# Altium PCB 核心板.PcbDoc (part 3 of 3)
Units mm, origin at the board's own origin, x right, y up, seen from the top; angles counter-clockwise.
Board outline 93.66 x 72.54 mm, 2 copper layers (Top Layer, Bottom Layer); 96 components, 149 nets, 537 pads, 213 vias.
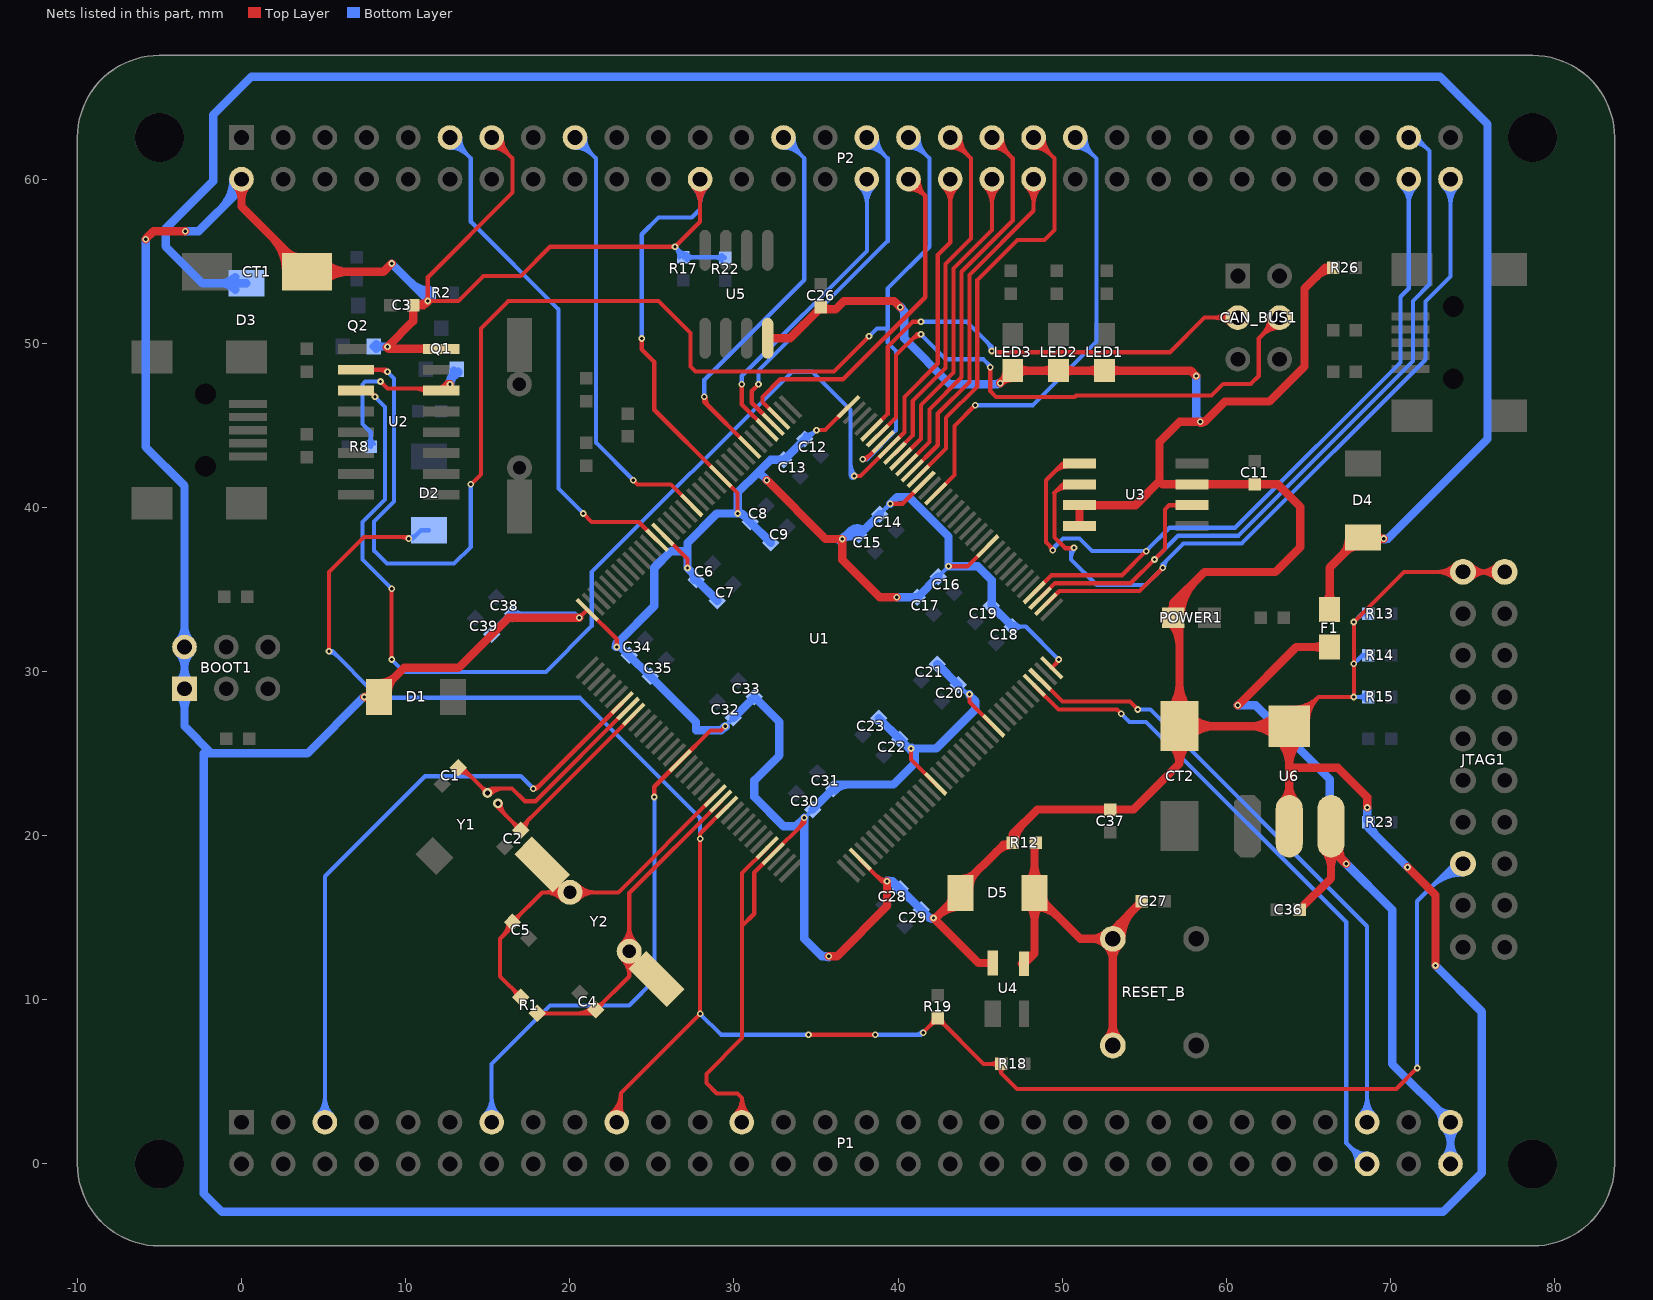
[diagram p3: the nets of this part, all layers, seen from the top]

## Via types
v1: diameter 0.406, hole 0.203, Top Layer to Bottom Layer, 212 vias
v2: diameter 0.508, hole 0.254, Top Layer to Bottom Layer, 1 vias

## Nets (pads, with @x,y where several pads share a name; then routed paths per layer and width w, separated by ;. In a path a pad name is that pad's centre, name@x,y a point inside that pad or via, vN(x,y) a via of type N, cw(c..) or ccw(c..) an arc to the next point about the centre after c; other vN are vias at no path point) (continued)
OSC32_IN: C1.1 U1.8 Y1.1 | length 17.5
  Top Layer w0.254: C1.1@13.208,23.876 cw(c13.208,22.65) 14.075,23.517 ; 13.642,23.95 ccw(c13.208,23.517) C1.1@13.208,24.13 13.462,24.13 Y1.1@14.986,22.606 15.262,22.882 16.488,22.882 17.272,22.098 17.903,22.098 U1.8@23.55,27.745 ; Y1.1@14.813,22.606 ccw(c14.395,22.606) 14.691,22.901 ccw(c14.986,23.197) Y1.1@14.986,22.779 ; Y1.1@14.929,22.663 cw(c15.457,22.135) 15.457,22.882 ; Y1.1@15.108,22.484 cw(c16.07,21.522) 16.07,22.882
OSC32_OUT: C2.1 U1.9 Y1.2 | length 14.8
  Top Layer w0.254: Y1.2@15.622,21.97 15.622,21.716 C2.1@17.018,20.32 17.018,20.506 U1.9@23.904,27.392 ; Y1.2@15.795,21.97 ccw(c16.826,21.97) 16.097,21.241 ; C2.1@16.764,20.32 ccw(c16.151,20.32) 16.584,20.754 ccw(c17.018,21.187) C2.1@17.018,20.574 ; C2.1@17.272,20.32 cw(c18.334,20.32) 17.583,21.071
OSC_IN: C5.1 R1.1 U1.23 Y2.2 | length 32
  Top Layer w0.254: 15.897,13.865 ccw(c15.03,14.732) C5.1@16.256,14.732 ; 16.33,14.298 ccw(c15.897,14.732) C5.1@16.51,14.732 ; C5.1@16.51,14.986 ccw(c16.51,15.599) 16.944,15.166 ccw(c17.377,14.732) C5.1@16.764,14.732 ; R1.1@16.764,10.16 ccw(c16.151,10.16) 16.584,10.594 ccw(c17.018,11.027) R1.1@17.018,10.414 ; R1.1@17.018,10.16 15.748,11.43 15.748,13.716 16.51,14.478 C5.1@16.51,14.732 ; Y2.2@19.565,16.097 ccw(c18.481,15.013) 18.481,16.546 ccw(c18.481,18.079) Y2.2@19.565,16.995 ; Y2.2@19.745,16.277 ccw(c19.095,15.626) 19.095,16.546 ccw(c19.095,17.466) Y2.2@19.745,16.816 ; Y2.2@20.284,16.277 cw(c20.934,15.626) 20.934,16.546 cw(c20.934,17.466) Y2.2@20.284,16.816 ; Y2.2@20.463,16.097 cw(c21.548,15.013) 21.548,16.546 cw(c21.548,18.079) Y2.2@20.463,16.995 ; U1.23@28.853,22.442 22.958,16.546 Y2.2@20.014,16.546 18.324,16.546 C5.1@16.51,14.732
OSC_OUT: C4.1 R1.2 U1.24 Y2.1 | length 30.8
  Top Layer w0.254: R1.2@18.006,9.172 21.364,9.172 C4.1@21.59,9.398 ; R1.2@18.185,8.993 cw(c18.619,8.559) 18.619,9.172 cw(c18.619,9.785) R1.2@18.185,9.352 ; 20.432,9.172 ccw(c20.432,10.556) C4.1@21.41,9.578 ; 21.045,9.172 ccw(c21.045,9.943) C4.1@21.59,9.398 ; C4.1@21.59,9.652 ccw(c21.59,10.265) 22.024,9.832 ccw(c22.457,9.398) C4.1@21.844,9.398 ; Y2.1@23.173,13.403 ccw(c22.089,14.487) 23.622,14.487 ccw(c25.155,14.487) Y2.1@24.071,13.403 ; Y2.1@23.175,12.503 cw(c22.111,11.43) 23.622,11.43 ; Y2.1@23.353,13.223 ccw(c22.702,13.874) 23.622,13.874 ccw(c24.542,13.874) Y2.1@23.891,13.223 ; Y2.1@23.354,12.683 cw(c22.715,12.04) 23.622,12.04 cw(c24.529,12.04) Y2.1@23.89,12.683 ; Y2.1@24.069,12.503 ccw(c25.133,11.43) 23.622,11.43 ; U1.24@29.207,22.088 23.622,16.503 Y2.1@23.622,12.954 23.622,11.43 ; C4.1@21.59,9.398 23.622,11.43
PA8: P2.35 U1.100 | length 25.4
  Top Layer w0.254: U1.100@39.814,43.302 40.894,44.382 40.894,46.482 42.901,48.489 42.901,54.839 44.45,56.388 44.45,61.27 P2.35@43.18,62.54 ; P2.35@43.18,61.917 cw(c43.18,60.413) 44.244,61.476 cw(c45.307,62.54) P2.35@43.803,62.54 ; P2.35@43.18,62.171 cw(c43.18,61.28) 43.81,61.91 cw(c44.44,62.54) P2.35@43.549,62.54
PA9: P2.36 U1.101 U2.3 | length 87.9
  Top Layer w0.254: U2.3@6.968,47.117 7.747,47.117 v1(8.128,46.736) ; U2.3@7.768,46.944 cw(c7.768,46.577) U2.3@8.027,46.837 ; U2.3@7.941,47.117 ccw(c8.409,47.117) v1@8.078,46.786 ; v1(9.144,30.734) v1(9.144,35.052) ; v1(37.338,41.91) 37.715,41.91 U1.101@39.46,43.655 40.386,44.581 40.386,46.736 42.418,48.768 42.418,55.372 43.18,56.134 P2.36@43.18,60 ; P2.36@42.739,59.559 cw(c41.676,58.496) 43.18,58.496 cw(c44.684,58.496) P2.36@43.621,59.559 ; P2.36@42.919,59.739 cw(c42.289,59.109) 43.18,59.109 cw(c44.071,59.109) P2.36@43.441,59.739
  Bottom Layer w0.254: v1(8.128,46.736) 8.738,46.126 8.738,40.488 7.366,39.116 7.366,36.83 v1(9.144,35.052) ; v1(9.144,30.734) 9.906,29.972 18.542,29.972 21.336,32.766 21.336,36.068 33.528,48.26 34.798,48.26 37.112,45.946 37.112,42.136 v1(37.338,41.91) ; 37.112,42.026 ccw(c37.454,42.026) v1@37.212,41.784 ; 37.112,42.639 ccw(c38.067,42.639) v1@37.392,41.964
PA10: P2.33 U1.102 U2.2 | length 93.4
  Top Layer w0.254: U2.2@6.968,48.387 8.763,48.387 v1(8.89,48.26) ; U2.2@7.89,48.265 cw(c8.186,47.969) 8.186,48.387 cw(c8.186,48.805) U2.2@7.89,48.509 ; 8.399,48.387 cw(c8.399,47.769) v1@8.836,48.206 ; v1(13.97,41.402) 14.584,42.016 14.584,50.907 16.256,52.578 25.4,52.578 27.356,50.622 27.356,48.59 27.657,48.289 36.097,48.289 v1(38.227,50.419) ; v1(37.846,42.926) 38.024,42.926 U1.102@39.106,44.009 ; v1@37.846,43.002 ccw(c37.846,43.615) 38.28,43.182
  Bottom Layer w0.254: v1(8.89,48.26) 9.296,47.854 9.296,40.364 8.079,39.146 8.079,37.362 8.865,36.576 12.954,36.576 13.97,37.592 v1(13.97,41.402) ; v1(37.846,42.926) 38.1,42.926 39.878,44.704 39.878,49.53 39.37,50.038 39.37,50.902 ; v1@37.846,43.002 ccw(c37.846,43.799) 38.41,43.236 ; v1(38.227,50.419) 38.71,50.902 39.37,50.902 ; P2.33@40.64,61.917 cw(c40.64,60.413) 41.704,61.476 cw(c42.767,62.54) P2.33@41.263,62.54 ; P2.33@40.64,62.171 cw(c40.64,61.28) 41.27,61.91 cw(c41.9,62.54) P2.33@41.009,62.54 ; P2.33@40.64,62.54 41.91,61.27 41.91,55.88 39.37,53.34 39.37,50.902
PA11: CAN_BUS1.4 U1.103 | length 39.8
  Top Layer w0.254: U1.103@38.753,44.362 39.878,45.487 39.878,49.276 41.148,50.546 v1(41.402,50.546) ; 40.838,50.236 cw(c41.402,49.673) v1@41.402,50.47 ; v1(45.618,48.539) 45.644,48.514 45.644,48.438 45.618,48.412 45.618,47.092 45.974,46.736 50.772,46.736 50.845,46.809 59.103,46.809 59.811,47.517 61.487,47.517 61.976,48.006 61.976,50.292 CAN_BUS1.4@63.246,51.562 ; CAN_BUS1.4@62.623,51.562 cw(c61.119,51.562) 62.182,50.498 cw(c63.246,49.435) CAN_BUS1.4@63.246,50.939 ; CAN_BUS1.4@62.877,51.562 cw(c61.986,51.562) 62.616,50.932 cw(c63.246,50.302) CAN_BUS1.4@63.246,51.193
  Bottom Layer w0.254: v1(41.402,50.546) 42.926,49.022 45.212,49.022 45.618,48.616 v1(45.618,48.539) ; 45.434,48.8 cw(c45.174,48.539) v1@45.542,48.539
PA12: CAN_BUS1.3 U1.104 | length 34
  Top Layer w0.254: U1.104@38.399,44.716 39.37,45.686 39.37,49.784 40.894,51.308 v1(41.402,51.308) ; v1(45.72,49.53) 45.796,49.454 56.566,49.454 58.674,51.562 CAN_BUS1.3@60.706,51.562 ; v1@45.774,49.584 ccw(c46.088,49.898) 46.088,49.454 ; CAN_BUS1.3@60.265,51.121 ccw(c59.202,50.058) 59.202,51.562 ccw(c59.202,53.066) CAN_BUS1.3@60.265,52.003 ; CAN_BUS1.3@60.445,51.301 ccw(c59.815,50.671) 59.815,51.562 ccw(c59.815,52.453) CAN_BUS1.3@60.445,51.823
  Bottom Layer w0.254: v1(41.402,51.308) 44.196,51.308 45.72,49.784 v1(45.72,49.53) ; 45.41,50.094 cw(c44.847,49.53) v1@45.644,49.53
PB10: P1.56 U1.69 | length 44
  Top Layer w0.254: U1.69@48.299,29.159 49.772,27.686 53.34,27.686 v1(53.594,27.432)
  Bottom Layer w0.254: v1(53.594,27.432) 54.102,26.924 55.118,26.924 67.31,14.732 67.31,13.97 67.31,1.27 P1.56@68.58,0 ; P1.56@67.957,0 ccw(c66.453,0) 67.516,1.064 ccw(c68.58,2.127) P1.56@68.58,0.623 ; P1.56@68.211,0 ccw(c67.32,0) 67.95,0.63 ccw(c68.58,1.26) P1.56@68.58,0.369
PB11: P1.55 U1.70 | length 41.9
  Top Layer w0.254: U1.70@48.652,29.513 48.677,29.513 50.021,28.169 54.127,28.169 v1(54.61,27.686)
  Bottom Layer w0.254: v1(54.61,27.686) 55.372,27.686 68.58,14.478 P1.55@68.58,2.54 ; P1.55@68.139,2.981 ccw(c67.076,4.044) 68.58,4.044 ccw(c70.084,4.044) P1.55@69.021,2.981 ; P1.55@68.319,2.801 ccw(c67.689,3.431) 68.58,3.431 ccw(c69.471,3.431) P1.55@68.841,2.801
PB13: P2.60 U1.74 U3.6 | length 61
  Top Layer w0.254: U1.74@49.006,34.109 49.03,34.109 49.821,34.9 54.712,34.9 v1(56.134,36.322) ; 49.519,40.883 cw(c50.343,40.059) U3.6@50.343,41.224 ; 49.953,41.317 cw(c50.343,40.926) U3.6@50.343,41.478 ; 50.479,37.516 ccw(c50.479,37.786) v1@50.67,37.595 ; v1(50.724,37.541) 50.698,37.516 50.19,37.516 49.53,38.176 49.53,40.894 50.038,41.402 U3.6@51.054,41.402
  Bottom Layer w0.254: 50.546,36.928 cw(c51.337,36.928) v1@50.778,37.487 ; v1(50.724,37.541) 50.546,37.363 50.546,36.83 52.108,35.268 55.08,35.268 v1(56.134,36.322) 56.134,36.546 57.383,37.795 60.937,37.795 72.136,48.994 72.136,52.548 73.66,54.072 P2.60@73.66,60 ; v1@56.21,36.322 cw(c56.936,36.322) 56.423,36.835 ; P2.60@73.219,59.559 cw(c72.156,58.496) 73.66,58.496 cw(c75.164,58.496) P2.60@74.101,59.559 ; P2.60@73.399,59.739 cw(c72.769,59.109) 73.66,59.109 cw(c74.551,59.109) P2.60@73.921,59.739
PB14: P2.57 U1.75 U3.2 | length 51.7
  Top Layer w0.254: U1.75@48.652,34.463 49.572,35.382 54.178,35.382 v1(55.626,36.83) 56.261,37.465 56.261,39.878 56.517,40.134 U3.2@57.912,40.134 ; U3.2@57.075,40.008 ccw(c56.772,39.704) 56.772,40.134 ccw(c56.772,40.563) U3.2@57.075,40.259
  Bottom Layer w0.254: v1(55.626,36.83) 57.074,38.278 60.738,38.278 71.374,48.914 71.374,52.578 72.39,53.594 72.39,61.722 71.572,62.54 P2.57@71.12,62.54 ; P2.57@71.141,62.427 cw(c71.301,61.55) 71.932,62.18 ; P2.57@71.187,62.177 cw(c71.407,60.972) 72.274,61.838 ; P2.57@71.743,62.54 ccw(c72.156,62.54) 71.864,62.248
PB15: P2.58 U1.76 U3.5 | length 58.5
  Top Layer w0.254: U1.76@48.299,34.816 49.347,35.865 53.645,35.865 v1(55.118,37.338) ; 49.238,37.664 cw(c48.962,37.389) v1@49.352,37.389 ; v1(49.428,37.389) 49.428,37.474 49.022,37.88 49.022,41.656 50.038,42.672 U3.5@51.054,42.672 ; 49.519,42.153 cw(c50.343,41.329) U3.5@50.343,42.494 ; 49.953,42.587 cw(c50.343,42.196) U3.5@50.343,42.748
  Bottom Layer w0.254: v1(49.428,37.389) 49.428,37.478 50.05,38.1 51.054,38.1 51.816,37.338 v1(55.118,37.338) 56.54,38.76 60.538,38.76 70.612,48.835 70.612,52.832 71.12,53.34 P2.58@71.12,60 ; v1@49.505,37.389 cw(c49.904,37.389) 49.622,37.672 ; P2.58@70.679,59.559 cw(c69.616,58.496) 71.12,58.496 cw(c72.624,58.496) P2.58@71.561,59.559 ; P2.58@70.859,59.739 cw(c70.229,59.109) 71.12,59.109 cw(c72.011,59.109) P2.58@71.381,59.739
PC6: P2.39 U1.96 | length 29.7
  Top Layer w0.254: U1.96@41.228,41.887 42.926,43.586 42.926,45.466 44.831,47.371 44.831,53.848 47.269,56.286 48.92,56.286 49.53,56.896 49.53,61.27 P2.39@48.26,62.54 P2.39@48.26,62.23 ; P2.39@48.26,61.917 cw(c48.26,60.413) 49.324,61.476 cw(c50.387,62.54) P2.39@48.883,62.54 ; P2.39@48.26,62.171 cw(c48.26,61.28) 48.89,61.91 cw(c49.52,62.54) P2.39@48.629,62.54
PC7: P2.40 U1.97 | length 24.6
  Top Layer w0.254: U1.97@40.874,42.241 42.418,43.785 42.418,45.72 44.348,47.65 44.348,54.161 48.26,58.072 P2.40@48.26,60 ; P2.40@47.819,59.559 cw(c46.756,58.496) 48.26,58.496 cw(c49.764,58.496) P2.40@48.701,59.559 ; P2.40@47.999,59.739 cw(c47.369,59.109) 48.26,59.109 cw(c49.151,59.109) P2.40@48.521,59.739
PC8: P2.37 U1.98 | length 26.9
  Top Layer w0.254: U1.98@40.521,42.594 41.91,43.984 41.91,45.974 43.866,47.93 43.866,54.361 46.99,57.485 46.99,61.27 P2.37@45.72,62.54 ; P2.37@45.72,61.917 cw(c45.72,60.413) 46.784,61.476 cw(c47.847,62.54) P2.37@46.343,62.54 ; P2.37@45.72,62.171 cw(c45.72,61.28) 46.35,61.91 cw(c46.98,62.54) P2.37@46.089,62.54
PC9: P2.38 U1.99 | length 23.1
  Top Layer w0.254: U1.99@40.167,42.948 41.402,44.183 41.402,46.228 43.383,48.209 43.383,54.561 45.72,56.897 P2.38@45.72,60 ; P2.38@45.279,59.559 cw(c44.216,58.496) 45.72,58.496 cw(c47.224,58.496) P2.38@46.161,59.559 ; P2.38@45.459,59.739 cw(c44.829,59.109) 45.72,59.109 cw(c46.611,59.109) P2.38@45.981,59.739
PC10: P2.34 U1.111 | length 25.3
  Top Layer w0.254: U1.111@32.742,45.423 31.75,46.415 31.75,46.736 32.82,47.806 36.655,47.806 41.656,52.807 41.656,58.984 ; P2.34@40.64,60 41.656,58.984 ; P2.34@40.652,59.631 cw(c40.678,58.835) 41.242,59.398 cw(c41.805,59.962) P2.34@41.009,59.988 ; P2.34@40.66,59.377 cw(c40.705,58.033) 41.656,58.984 ; P2.34@41.263,59.98 ccw(c42.607,59.935) 41.656,58.984
PC11: P2.31 U1.112 | length 25.7
  Top Layer w0.254: v1(31.496,47.498) 31.085,47.087 31.085,46.373 U1.112@32.389,45.069
  Bottom Layer w0.254: v1(31.496,47.498) 31.496,48.347 39.37,56.221 39.37,61.27 P2.31@38.1,62.54 ; P2.31@38.1,61.917 cw(c38.1,60.413) 39.164,61.476 cw(c40.227,62.54) P2.31@38.723,62.54 ; P2.31@38.1,62.171 cw(c38.1,61.28) 38.73,61.91 cw(c39.36,62.54) P2.31@38.469,62.54
PC12: P2.32 U1.113 | length 22.8
  Top Layer w0.254: v1(30.48,47.498) 30.48,46.271 U1.113@32.035,44.716
  Bottom Layer w0.254: v1(30.48,47.498) 30.48,48.013 38.1,55.633 P2.32@38.1,60 ; P2.32@37.659,59.559 cw(c36.596,58.496) 38.1,58.496 cw(c39.604,58.496) P2.32@38.541,59.559 ; P2.32@37.839,59.739 cw(c37.209,59.109) 38.1,59.109 cw(c38.991,59.109) P2.32@38.361,59.739
PC13: P1.5 U1.7 | length 42.4
  Top Layer w0.254: v1(17.78,22.86) 17.958,22.86 U1.7@23.197,28.099 ; v1@17.78,22.936 ccw(c17.78,23.549) 18.214,23.116
  Bottom Layer w0.254: P1.5@4.639,2.981 ccw(c3.576,4.044) 5.08,4.044 ccw(c6.584,4.044) P1.5@5.521,2.981 ; P1.5@4.819,2.801 ccw(c4.189,3.431) 5.08,3.431 ccw(c5.971,3.431) P1.5@5.341,2.801 ; P1.5@5.08,2.54 5.08,17.526 11.176,23.622 17.018,23.622 v1(17.78,22.86)
PD2: P2.27 U1.116 | length 27.6
  Top Layer w0.254: v1(28.194,46.736) 28.194,46.436 U1.116@30.975,43.655 ; v1@28.27,46.736 ccw(c29.179,46.736) 28.536,46.093
  Bottom Layer w0.254: v1(28.194,46.736) 28.194,47.775 34.29,53.871 34.29,61.27 P2.27@33.02,62.54 ; P2.27@33.02,61.917 cw(c33.02,60.413) 34.084,61.476 cw(c35.147,62.54) P2.27@33.643,62.54 ; P2.27@33.02,62.171 cw(c33.02,61.28) 33.65,61.91 cw(c34.28,62.54) P2.27@33.389,62.54
PG8: P2.41 U1.93 | length 32.1
  Top Layer w0.254: U1.93@42.288,40.827 43.434,41.972 43.434,44.958 v1(44.704,46.228)
  Bottom Layer w0.254: v1(44.704,46.228) 48.222,46.228 52.092,50.098 52.092,61.248 P2.41@50.8,62.54 ; P2.41@50.8,61.917 cw(c50.8,60.413) 51.864,61.476 cw(c52.927,62.54) P2.41@51.423,62.54 ; P2.41@50.8,62.171 cw(c50.8,61.28) 51.43,61.91 cw(c52.06,62.54) P2.41@51.169,62.54
PG11: P2.17 U1.126 | length 30.3
  Top Layer w0.254: v1(23.876,41.656) 24.13,41.402 26.157,41.402 U1.126@27.439,40.12
  Bottom Layer w0.254: P2.17@20.32,61.917 cw(c20.32,60.413) 21.384,61.476 cw(c22.447,62.54) P2.17@20.943,62.54 ; P2.17@20.32,62.171 cw(c20.32,61.28) 20.95,61.91 cw(c21.58,62.54) P2.17@20.689,62.54 ; P2.17@20.32,62.54 21.59,61.27 21.59,43.942 v1(23.876,41.656)
PG15: P2.11 U1.132 | length 35.2
  Top Layer w0.254: v1(20.828,39.624) 21.336,39.116 24.2,39.116 U1.132@25.318,37.998
  Bottom Layer w0.254: P2.11@12.7,61.917 cw(c12.7,60.413) 13.764,61.476 cw(c14.827,62.54) P2.11@13.323,62.54 ; P2.11@12.7,62.171 cw(c12.7,61.28) 13.33,61.91 cw(c13.96,62.54) P2.11@13.069,62.54 ; P2.11@12.7,62.54 13.97,61.27 13.97,57.404 19.304,52.07 19.304,41.148 v1(20.828,39.624)
RESET: D2.1 JTAG1.15 P1.19 R18.1 R19.1 U1.25 | length 138.4
  Top Layer w0.254: v1(5.334,31.242) 5.334,36.068 7.458,38.192 10.093,38.192 v1(10.185,38.1) ; 9.778,38.192 cw(c9.778,37.693) v1@10.132,38.046 ; P1.19@22.481,3.034 ccw(c21.496,4.318) 23.114,4.318 ; P1.19@22.635,2.833 ccw(c21.891,3.803) 23.114,3.803 ; P1.19@22.79,2.631 ccw(c22.286,3.288) 23.114,3.288 ; P1.19@22.86,2.54 23.114,2.794 23.114,4.318 ; 23.114,3.431 ccw(c23.751,3.431) P1.19@23.301,2.981 ; U1.25@29.56,21.735 27.94,20.114 v1(27.94,19.812) v1(27.94,9.144) 23.114,4.318 ; v1(34.544,7.874) v1(38.608,7.874) ; v1(41.529,8.001) R19.1@42.418,8.89 45.212,6.096 R18.1@46.28,6.096 46.28,5.536 ; R19.1@42.164,8.89 cw(c41.551,8.89) 41.984,8.456 cw(c42.418,8.023) 42.418,8.636 cw(c42.418,8.023) 42.852,8.456 cw(c43.285,8.89) R19.1@42.672,8.89 ; R18.1@46.1,5.916 ccw(c45.667,5.483) 45.667,6.096 ccw(c45.667,6.709) R18.1@46.1,6.276 ; R18.1@46.113,5.905 cw(c45.79,5.536) 46.28,5.536 ; R18.1@46.447,5.905 ccw(c46.769,5.536) 46.28,5.536 ; v1(71.628,5.842) 70.358,4.572 47.244,4.572 46.28,5.536
  Bottom Layer w0.254: v1@5.334,31.166 cw(c5.334,30.495) 5.808,30.969 ; v1(5.334,31.242) 5.536,31.242 8.077,28.701 8.077,28.66 8.34,28.397 20.625,28.397 27.94,21.082 v1(27.94,19.812) ; v1(10.185,38.1) 10.439,38.1 10.947,38.608 D2.1@11.43,38.608 ; v1@10.185,38.176 ccw(c10.185,38.973) D2.1@10.749,38.41 ; v1(27.94,9.144) 29.21,7.874 v1(34.544,7.874) ; v1(38.608,7.874) 41.402,7.874 v1(41.529,8.001) ; 41.038,7.874 ccw(c41.038,8.492) v1@41.475,8.055 ; v1(71.628,5.842) 71.628,16.002 73.914,18.288 JTAG1.15@74.422,18.288 ; 72.427,16.801 cw(c74.422,14.807) JTAG1.15@74.422,17.628 ; 72.861,17.235 cw(c74.422,15.674) JTAG1.15@74.422,17.882 ; 73.295,17.669 cw(c74.422,16.541) JTAG1.15@74.422,18.136 ; 73.654,18.028 ccw(c73.394,18.288) JTAG1.15@73.762,18.288
RSTIN: C27.1 D5.1 R12.2 RESET_B.2 U4.3 | length 39.7
  Top Layer w0.508: U4.3@47.533,12.204 ccw(c47.597,12.39) U4.3@47.736,12.251 ; U4.3@47.677,12.192 48.312,12.827 ; U4.3@47.697,12.685 ccw(c47.89,13.248) 48.312,12.827 ; D5.1@47.926,15.824 cw(c46.994,14.892) 48.312,14.892 cw(c49.63,14.892) D5.1@48.698,15.824 ; D5.1@47.926,17.196 ccw(c46.994,18.128) 48.312,18.128 ccw(c49.63,18.128) D5.1@48.698,17.196 ; D5.1@48.312,15.664 cw(c48.312,13.622) 49.756,15.066 ; 48.312,19.07 cw(c48.875,19.07) R12.2@48.477,19.468 ; R12.2@48.387,19.558 48.312,19.483 D5.1@48.312,16.51 ; D5.1@48.858,16.21 ccw(c49.452,16.21) D5.1@49.032,15.79 ; RESET_B.2@52.709,7.593 ccw(c51.798,8.504) 53.086,8.504 ccw(c54.374,8.504) RESET_B.2@53.463,7.593 ; RESET_B.2@52.709,14.093 cw(c51.798,15.004) 51.798,13.716 cw(c51.798,12.428) 52.709,13.339 cw(c51.798,12.428) 53.086,12.428 cw(c54.374,12.428) RESET_B.2@53.463,13.339 ; RESET_B.2@53.086,7.216 RESET_B.2@53.086,13.716 ; RESET_B.2@53.111,13.716 cw(c54.399,13.716) 53.489,14.627 ; RESET_B.2@53.619,13.716 cw(c56.134,13.716) 54.356,15.494 ; C27.1@54.864,16.002 53.086,14.224 RESET_B.2@53.086,13.716 ; 48.312,12.827 D5.1@48.312,16.51 ; D5.1@48.312,16.51 51.106,13.716 RESET_B.2@53.086,13.716
RTS: Q1.1 R8.1 U2.14 | length 15.1
  Top Layer w0.254: v1(8.468,47.666) 8.89,47.244 12.041,47.244 U2.14@12.168,47.117 ; 10.644,47.244 cw(c10.644,46.393) U2.14@11.246,46.995
  Top Layer w0.508: U2.14@12.168,47.117 12.549,47.498 v1(12.7,47.498)
  Bottom Layer w0.254: R8.1@7.694,43.868 ccw(c7.261,44.301) 7.874,44.301 ccw(c8.487,44.301) R8.1@8.054,43.868 ; R8.1@7.874,43.688 7.874,44.577 7.366,45.085 7.366,47.498 7.534,47.666 v1(8.468,47.666)
  Bottom Layer w0.508: v1@12.649,47.498 cw(c13.14,47.498) 12.793,47.845 ; v1@12.7,47.404 cw(c13.59,47.404) Q1.1@13.203,48.205 ; v1(12.7,47.498) 12.7,47.752 Q1.1@13.208,48.26 ; v1@12.7,47.626 cw(c13.276,47.626) Q1.1@13.158,48.19 ; 12.806,47.858 ccw(c12.465,48.199) Q1.1@12.929,48.329
USB_5V1: D3.2 D4.2 F1.2 | length 137.4
  Top Layer w0.254: F1.2@66.296,33.782 F1.2@66.802,34.288
  Top Layer w0.508: F1.2@66.026,34.178 ccw(c65.376,34.829) 66.296,34.829 ccw(c67.215,34.829) F1.2@66.565,34.178 ; F1.2@66.296,33.782 66.296,36.324 67.89,37.918 68.652,37.918 68.834,38.1 v1(69.596,38.1) ; 67.01,37.038 ccw(c65.877,38.172) D4.2@67.48,38.172 ; 67.295,37.323 cw(c68.026,36.593) D4.2@68.026,37.626 ; D4.2@69.057,37.837 cw(c69.596,37.417) v1(69.596,38.1) ; D4.2@69.121,38.403 ccw(c69.596,38.624) v1(69.596,38.1)
  Bottom Layer w0.508: D3.2@-0.386,53.268 ccw(c-1.318,52.336) -1.318,53.654 ccw(c-1.318,54.972) D3.2@-0.386,54.04 ; D3.2@0.3,53.654 -2.371,53.654 -4.623,55.905 -4.623,56.977 -1.727,59.873 -1.727,63.911 0.61,66.248 73.025,66.248 75.921,63.353 75.921,44.171 69.85,38.1 v1(69.596,38.1) ; v1@69.596,38.049 ccw(c69.596,38.54) 69.943,38.193
VCC5V: C36.2 F1.1 P1.59 P1.60 U6.3 | length 60.4
  Top Layer w0.508: v1(60.706,27.94) 64.262,31.496 F1.1@66.296,31.496 ; C36.2@64.473,15.494 66.379,17.4 U6.3@66.379,20.572 66.379,19.219 v1(67.31,18.288) ; U6.3@65.975,19.089 cw(c64.999,18.113) 66.379,18.113 cw(c67.759,18.113) U6.3@66.783,19.089 ; F1.1@66.026,31.227 ccw(c65.376,30.576) 65.376,31.496 ccw(c65.376,32.416) F1.1@66.026,31.765 ; U6.3@66.379,18.921 cw(c66.379,18.202) 66.887,18.711 ; U6.3@66.93,19.342 ccw(c67.841,19.093) v1@67.173,18.425
  Bottom Layer w0.508: v1(60.706,27.94) 61.797,27.94 66.294,23.443 66.294,19.304 v1(67.31,18.288) 70.104,15.494 70.104,6.096 P1.59@73.66,2.54 P1.60@73.66,0 ; P1.59@73.164,2.54 ccw(c71.967,2.54) 72.813,3.387 ccw(c73.66,4.233) P1.59@73.66,3.036 ; P1.60@73.309,0.351 ccw(c72.463,1.197) 73.66,1.197 ccw(c74.857,1.197) P1.60@74.011,0.351 ; P1.59@73.309,2.189 cw(c72.463,1.343) 73.66,1.343 cw(c74.857,1.343) P1.59@74.011,2.189
VDDA: BOOT1.1 BOOT1.2 C3.2 C6.2 C7.2 C8.1 C9.1 C11.1 C12.2 C13.2 C14.2 C15.2 C16.2 C17.2 C18.2 C19.2 C20.2 C21.2 C22.2 C23.2 C26.2 C28.1 C29.1 C30.1 C31.1 C32.1 C33.1 C34.1 C35.1 C37.1 C38.1 C39.1 CT1.1 CT2.1 D1.1 D5.2 JTAG1.1 JTAG1.2 LED1.1 LED2.1 LED3.1 P1.13 P1.25 P2.2 P2.13 P2.24 POWER1.1 Q2.1 R2.2 R12.1 R13.1 R14.1 R15.1 R17.2 R22.2 R23.1 R26.2 U1.17 U1.32 U1.33 U1.39 U1.52 U1.62 U1.72 U1.84 U1.95 U1.108 U1.121 U1.131 U1.144 U2.16 U3.3 U3.7 U3.8 U4.4 U5.8 U6.2 U6.4 | length 797.5
  Top Layer w0.254: P2.13@15.24,61.917 cw(c15.24,60.413) 16.304,61.476 cw(c17.367,62.54) P2.13@15.863,62.54 ; P2.13@15.24,62.171 cw(c15.24,61.28) 15.87,61.91 cw(c16.5,62.54) P2.13@15.609,62.54 ; P2.13@15.24,62.54 16.51,61.27 16.51,59.182 11.346,54.018 v1(11.346,52.578) 13.208,52.578 14.732,54.102 17.018,54.102 18.796,55.88 v1(26.416,55.88) 27.94,57.404 P2.24@27.94,60 ; v1(20.574,33.274) 21.056,33.756 U1.144@21.075,33.756 22.86,31.971 v1(22.86,31.496) ; v1(24.384,50.292) 24.384,49.632 25.146,48.87 25.146,45.948 U1.121@29.207,41.887 30.226,40.868 v1(30.226,39.624) ; v1(25.146,22.352) 25.146,22.977 U1.17@26.732,24.563 28.585,26.416 29.21,26.416 v1(29.464,26.67) ; U1.131@25.671,38.352 27.172,36.852 v1(27.172,36.303) ; P2.24@27.499,59.559 cw(c26.436,58.496) 27.94,58.496 cw(c29.444,58.496) P2.24@28.381,59.559 ; P2.24@27.679,59.739 cw(c27.049,59.109) 27.94,59.109 cw(c28.831,59.109) P2.24@28.201,59.739 ; P1.25@30.057,2.998 ccw(c29.12,4.013) 30.502,4.013 ; P1.25@30.23,2.811 ccw(c29.655,3.433) 30.502,3.433 ; P1.25@30.48,2.54 30.502,2.562 30.502,4.014 ; 30.502,3.377 ccw(c31.317,3.377) P1.25@30.741,2.801 ; 30.502,3.99 ccw(c31.93,3.99) P1.25@30.921,2.981 ; U1.32@32.035,19.26 30.502,17.727 30.502,14.5 ; 33.966,20.483 ccw(c33.367,21.082) v1@34.214,21.082 ; v1(34.29,21.082) 34.29,20.807 U1.33@32.389,18.906 31.242,17.759 31.242,15.24 30.502,14.5 ; v1(35.036,44.708) 35.563,44.708 U1.108@36.985,46.13 ; U1.39@37.687,18.553 U1.39@37.692,18.553 39.032,17.213 v1(39.324,17.213) ; 38.696,17.549 ccw(c39.324,18.178) v1@39.324,17.289 ; v1(39.523,40.22) 40.267,40.22 U1.95@41.581,41.534 ; v1(40.792,25.311) 40.792,24.646 U1.52@42.288,23.149 ; v1(43.079,36.41) 44.236,36.41 U1.84@45.47,37.645 ; v1(44.354,28.618) 44.354,28.155 U1.62@45.824,26.685 ; U1.72@49.359,30.22 49.784,30.645 v1(49.784,30.734) ; 49.591,30.451 ccw(c49.308,30.734) v1@49.708,30.734 ; CT2.1@57.15,26.67 CT2.1@57.152,26.668 ; U6.4@63.839,26.668 65.618,28.448 ; U6.4@63.881,27.302 ccw(c63.964,28.521) 64.827,27.657 ccw(c65.691,26.793) U6.4@64.472,26.711 ; U6.4@63.899,27.555 ccw(c64.013,29.262) 65.223,28.052 ccw(c66.432,26.843) U6.4@64.726,26.728 ; U6.4@63.916,27.809 ccw(c64.063,30.003) 65.618,28.448 ; U6.4@64.979,26.745 cw(c67.173,26.893) 65.618,28.448 ; JTAG1.1@73.955,35.601 ccw(c72.828,34.474) 72.828,36.068 ccw(c72.828,37.662) JTAG1.1@73.955,36.535 ; JTAG1.1@74.135,35.781 ccw(c73.441,35.087) 73.441,36.068 ccw(c73.441,37.049) JTAG1.1@74.135,36.355 ; JTAG1.1@74.709,35.781 cw(c75.403,35.087) 75.403,36.068 cw(c75.403,37.049) JTAG1.1@74.709,36.355 ; JTAG1.1@74.889,35.601 cw(c76.016,34.474) 76.016,36.068 cw(c76.016,37.662) JTAG1.1@74.889,36.535 ; JTAG1.2@76.495,35.601 ccw(c75.368,34.474) 75.368,36.068 ccw(c75.368,37.662) JTAG1.2@76.495,36.535 ; JTAG1.2@76.675,35.781 ccw(c75.981,35.087) 75.981,36.068 ccw(c75.981,37.049) JTAG1.2@76.675,36.355 ; JTAG1.2@76.962,36.068 JTAG1.1@74.422,36.068 70.823,36.068 v1(67.775,33.02) v1(67.775,30.48) v1(67.775,28.448) 65.618,28.448 ; 30.502,4.014 30.223,4.293 28.956,4.293 28.321,4.928 28.321,5.486 30.502,7.668 30.502,14.5
  Top Layer w0.508: v1(-5.842,56.342) -5.359,56.825 v1(-3.429,56.825) ; P2.2@-0.351,59.649 cw(c-1.197,58.803) 0,58.803 cw(c1.197,58.803) P2.2@0.351,59.649 ; P2.2@0,60 0,58.336 CT1.1@3.98,54.356 8.636,54.356 v1(9.144,54.864) ; 1.812,56.524 cw(c-0.356,54.356) CT1.1@2.71,54.356 ; 2.679,55.657 cw(c1.378,54.356) CT1.1@3.218,54.356 ; 2.732,55.604 ccw(c3.599,56.471) CT1.1@3.599,55.245 ; CT1.1@4.99,53.727 cw(c6.507,52.21) 6.507,54.356 cw(c6.507,56.502) CT1.1@4.99,54.985 ; D1.1@7.901,28.189 ccw(c7.468,27.955) v1(7.468,28.448) ; D1.1@7.901,28.707 cw(c7.468,28.941) v1(7.468,28.448) ; D1.1@8.382,29.294 ccw(c8.382,30.723) 9.393,29.713 ; v1@8.854,49.748 ccw(c9.074,49.968) 9.074,49.657 ; D1.1@8.928,28.748 cw(c10.135,28.748) 9.282,29.602 ; C3.2@10.513,52.438 ccw(c10.831,53.093) v1(11.346,52.578) 11.092,52.324 C3.2@10.457,52.324 10.457,51.351 v1(8.89,49.784) 9.017,49.657 U2.16@12.168,49.657 ; 10.855,52.324 ccw(c10.855,53.069) v1@11.382,52.542 ; v1(20.574,33.274) 16.256,33.274 13.208,30.226 9.906,30.226 8.128,28.448 v1(7.468,28.448) ; v1(32.004,41.656) 35.582,38.078 v1(36.611,38.078) 36.611,36.795 38.89,34.516 v1(39.919,34.516) ; U5.8@32.055,50.306 33.415,50.306 35.179,52.07 36.195,52.07 36.703,52.578 39.751,52.578 v1(40.132,52.197) ; C26.2@35.396,52.287 ccw(c35.919,52.81) 35.919,52.07 ; v1(35.789,12.649) 36.271,12.649 39.324,15.702 v1(39.324,17.213) ; 42.368,15.066 cw(c43.812,13.622) D5.2@43.812,15.664 ; D5.2@43.092,15.79 ccw(c42.672,16.21) D5.2@43.266,16.21 ; D5.2@43.812,17.356 ccw(c43.812,18.609) 44.698,17.723 ; D5.2@44.358,16.81 cw(c45.741,16.81) 44.763,17.788 ; U4.4@45.772,12.244 44.906,12.244 v1(42.164,14.986) 42.288,14.986 D5.2@43.812,16.51 43.812,16.837 46.418,19.444 ; 45.993,19.018 cw(c46.99,18.021) R12.1@46.99,19.431 ; 46.19,19.215 cw(c46.772,18.632) R12.1@46.961,19.434 ; LED3.1@46.386,47.732 ccw(c45.846,48.271) LED3.1@46.609,48.271 ; R12.1@46.899,19.647 cw(c46.418,20.114) 46.418,19.444 ; LED3.1@46.99,47.89 ccw(c46.99,46.813) v1(46.228,47.574) LED3.1@46.99,48.336 LED2.1@49.784,48.336 LED1.1@52.578,48.336 57.836,48.336 v1(58.166,48.006) ; R12.1@47.117,19.558 cw(c48.711,19.558) 47.584,20.685 ; LED3.1@47.259,48.067 cw(c47.91,47.416) 47.91,48.336 cw(c47.91,49.256) LED3.1@47.259,48.605 ; LED2.1@49.515,48.067 ccw(c48.864,47.416) 48.864,48.336 ccw(c48.864,49.256) LED2.1@49.515,48.605 ; LED2.1@50.053,48.067 cw(c50.704,47.416) 50.704,48.336 cw(c50.704,49.256) LED2.1@50.053,48.605 ; U3.8@51.054,38.862 U3.7@51.054,40.132 54.465,40.132 55.935,41.602 ; LED1.1@52.309,48.067 ccw(c51.658,47.416) 51.658,48.336 ccw(c51.658,49.256) LED1.1@52.309,48.605 ; LED1.1@52.847,48.067 cw(c53.498,47.416) 53.498,48.336 cw(c53.498,49.256) LED1.1@52.847,48.605 ; POWER1.1@56.506,33.55 ccw(c55.922,34.163) 56.769,34.163 ; CT2.1@56.521,27.68 ccw(c55.004,29.197) 57.15,29.197 ccw(c59.296,29.197) CT2.1@57.779,27.68 ; POWER1.1@56.565,33.005 cw(c55.151,31.591) 57.15,31.591 ; CT2.1@56.579,25.608 cw(c55.554,24.384) 57.15,24.384 ; POWER1.1@56.707,33.274 cw(c58.704,33.274) 57.292,34.686 ; POWER1.1@57.032,33.55 cw(c57.616,34.163) 56.769,34.163 ; CT2.1@57.152,26.668 U6.4@63.839,26.668 63.839,23.876 ; POWER1.1@57.215,33.274 cw(c60.438,33.274) 58.159,35.553 ; CT2.1@57.721,25.608 ccw(c58.746,24.384) 57.15,24.384 ; CT2.1@57.779,26.041 cw(c59.292,24.528) 59.292,26.668 ; CT2.1@57.779,27.299 ccw(c59.3,28.82) 59.3,26.668 ; U3.3@58.166,41.404 U3.3@57.912,41.404 ; v1@58.42,45.161 ccw(c58.42,45.652) 58.767,45.305 ; U3.3@58.674,41.404 U3.3@57.912,41.404 ; U6.4@63.12,27.387 cw(c61.386,29.121) 61.386,26.668 cw(c61.386,24.216) 63.12,25.95 cw(c61.386,24.216) 63.839,24.216 cw(c66.292,24.216) U6.4@64.557,25.95 ; U6.2@63.435,22.056 ccw(c62.459,23.032) 63.839,23.032 ccw(c65.219,23.032) U6.2@64.243,22.056 ; U6.2@63.839,20.572 63.839,23.876 ; 65.494,54.064 cw(c66.505,53.054) R26.2@66.505,54.483 ; 65.808,54.378 cw(c66.214,53.971) R26.2@66.452,54.494 ; R26.2@66.505,54.61 66.04,54.61 64.77,53.34 64.77,48.59 62.628,46.448 59.91,46.448 58.674,45.212 v1(58.42,45.212) 57.15,45.212 55.935,43.997 55.935,41.602 ; v1(68.58,21.717) 68.58,22.352 66.802,24.13 64.093,24.13 63.839,23.876 ; v1(71.044,18.085) 72.746,16.383 v1(72.746,12.09) ; 46.418,19.444 46.876,19.444 R12.1@46.99,19.558 46.99,20.091 48.489,21.59 C37.1@52.916,21.59 54.356,21.59 57.15,24.384 ; 55.935,41.602 56.134,41.404 U3.3@57.912,41.404 ; 56.769,34.163 POWER1.1@56.769,33.274 57.15,32.893 CT2.1@57.15,26.67 57.15,24.384 ; 56.769,34.163 58.674,36.068 62.992,36.068 64.516,37.592 64.516,40.027 63.141,41.402 C11.1@61.722,41.402 61.72,41.404 U3.3@57.912,41.404
  Bottom Layer w0.254: P1.13@14.799,2.981 ccw(c13.736,4.044) 15.24,4.044 ccw(c16.744,4.044) P1.13@15.681,2.981 ; P1.13@14.979,2.801 ccw(c14.349,3.431) 15.24,3.431 ccw(c16.131,3.431) P1.13@15.501,2.801 ; P1.13@15.24,2.54 15.24,6.096 18.796,9.652 23.622,9.652 25.168,11.198 25.168,22.33 v1(25.146,22.352) ; C38.1@16.51,33.528 20.32,33.528 v1(20.574,33.274) ; C38.1@16.69,33.348 cw(c17.123,32.915) 17.123,33.528 cw(c17.123,34.141) C38.1@16.69,33.708 ; v1(24.384,50.292) 24.384,56.642 25.4,57.658 27.432,57.658 27.94,58.166 P2.24@27.94,60 ; v1@25.092,22.298 cw(c24.908,22.114) 25.168,22.114 ; v1@26.401,55.895 cw(c25.75,55.245) R17.2@26.67,55.245 ; v1(26.416,55.88) 26.924,55.372 R17.2@26.924,55.245 29.426,55.245 R22.2@29.464,55.207 ; R17.2@26.707,55.589 ccw(c26.924,55.806) R17.2@26.924,55.499 ; R17.2@27.104,55.065 cw(c27.537,54.632) 27.537,55.245 cw(c27.537,55.858) R17.2@27.104,55.425 ; P2.24@27.499,59.559 cw(c26.436,58.496) 27.94,58.496 cw(c29.444,58.496) P2.24@28.381,59.559 ; P2.24@27.679,59.739 cw(c27.049,59.109) 27.94,59.109 cw(c28.831,59.109) P2.24@28.201,59.739 ; 28.759,55.245 cw(c28.759,54.501) R22.2@29.284,55.027 ; 28.943,55.245 ccw(c28.943,55.728) R22.2@29.284,55.386 ; v1(29.464,26.67) C32.1@29.972,27.178 ; v1(34.29,21.082) C30.1@34.798,21.59 ; C12.2@34.318,44.168 34.496,44.168 v1(35.036,44.708) cw(c34.345,45.398) C12.2@34.324,44.422 ; C14.2@38.89,39.596 38.899,39.596 v1(39.523,40.22) ; v1@40.673,25.311 v1(40.792,25.311) ; C16.2@42.446,35.786 42.454,35.786 v1(43.079,36.41) ; C20.2@43.66,29.182 44.223,28.618 v1(44.354,28.618) ; 44.001,28.84 ccw(c44.354,29.193) v1@44.354,28.694 ; C18.2@46.962,32.738 47.78,32.738 v1(49.784,30.734) ; C18.2@47.141,32.558 cw(c47.575,32.125) 47.575,32.738 cw(c47.575,33.351) C18.2@47.141,32.917 ; v1(67.775,28.448) R15.1@68.664,28.448 ; v1(67.775,30.48) 68.283,30.988 R14.1@68.664,30.988 ccw(c68.661,30.076) 68.016,30.721 ; v1(67.775,33.02) 68.283,33.528 R13.1@68.664,33.528 ccw(c68.661,32.616) 68.016,33.261 ; R15.1@68.484,28.268 ccw(c68.051,27.835) 68.051,28.448 ccw(c68.051,29.061) R15.1@68.484,28.628
  Bottom Layer w0.508: v1(-5.842,56.342) -5.842,43.688 -3.472,41.318 BOOT1.2@-3.472,31.496 BOOT1.1@-3.472,28.956 -3.472,26.67 -1.821,25.019 ; BOOT1.1@-3.823,28.605 cw(c-4.669,27.759) -3.472,27.759 cw(c-2.275,27.759) BOOT1.1@-3.121,28.605 ; BOOT1.1@-3.823,29.307 ccw(c-4.669,30.153) -3.472,30.153 ccw(c-2.275,30.153) BOOT1.1@-3.121,29.307 ; BOOT1.2@-3.823,31.145 cw(c-4.669,30.299) -3.472,30.299 cw(c-2.275,30.299) BOOT1.2@-3.121,31.145 ; BOOT1.2@-3.823,31.847 ccw(c-4.669,32.693) -3.472,32.693 ccw(c-2.275,32.693) BOOT1.2@-3.121,31.847 ; v1(-3.429,56.825) -2.616,56.825 -0.198,59.243 -0.198,59.802 P2.2@0,60 ; -1.242,58.199 ccw(c-3.043,60) P2.2@-0.496,60 ; -0.375,59.067 ccw(c-1.308,60) P2.2@0.012,60 ; v1(7.468,28.448) 7.442,28.448 4.013,25.019 -2.311,25.019 -2.311,-1.803 -1.194,-2.921 73.203,-2.921 75.565,-0.559 75.565,9.271 v1(72.746,12.09) ; Q2.1@8.062,49.804 8.87,49.804 v1(8.89,49.784) ; Q2.1@8.201,49.665 cw(c8.535,49.331) 8.535,49.804 cw(c8.535,50.277) Q2.1@8.201,49.943 ; v1(9.144,54.864) 11.346,52.662 v1(11.346,52.578) ; 10.316,53.692 ccw(c11.473,54.85) R2.2@11.473,53.213 ; R2.2@11.183,52.825 ccw(c11.473,53.115) R2.2@11.473,52.705 ; v1@11.346,52.562 cw(c11.886,52.562) R2.2@11.552,52.986 ; C39.1@15.24,32.258 C38.1@16.51,33.528 ; v1(22.86,31.496) 22.86,31.75 22.952,31.842 ; v1@22.86,31.547 cw(c22.86,31.056) 23.207,31.403 ; 27.376,36.099 cw(c26.865,35.588) C6.2@27.587,35.588 ; 28.973,26.416 ccw(c28.973,27.161) v1@29.5,26.634 ; C7.2@28.984,34.318 C6.2@27.714,35.588 27.714,35.76 v1(27.172,36.303) 27.172,37.084 ; v1(29.464,26.67) 29.21,26.416 27.686,26.416 27.686,26.924 C35.1@24.892,29.718 C34.1@23.622,30.988 22.952,31.658 22.952,31.842 ; C32.1@29.972,27.178 C33.1@31.242,28.448 32.766,26.924 32.766,24.892 31.242,23.368 31.242,22.352 33.02,20.574 33.782,20.574 v1(34.29,21.082) 34.29,13.716 35.357,12.649 v1(35.789,12.649) ; v1@30.226,39.675 cw(c30.226,39.184) 30.573,39.531 ; v1(32.004,41.656) 31.496,42.164 ; C9.1@32.258,37.846 C8.1@30.988,39.116 30.48,39.624 v1(30.226,39.624) ; C12.2@34.318,44.168 C13.2@33.048,42.898 32.23,42.898 31.496,42.164 ; C30.1@34.798,21.59 C31.1@36.068,22.86 36.322,23.114 39.725,23.114 41.024,24.413 41.024,24.96 40.673,25.311 C22.2@40.104,25.88 C23.2@38.834,27.15 ; 35.138,12.868 ccw(c35.789,13.518) v1@35.789,12.598 ; C31.1@36.158,22.77 cw(c36.988,21.94) 36.988,23.114 ; v1@36.477,37.945 cw(c37.239,37.183) C15.2@37.58,38.205 ; v1@36.575,38.114 cw(c37.086,37.603) C15.2@37.086,38.326 ; v1(36.611,38.078) 36.858,38.326 C15.2@37.62,38.326 C14.2@38.89,39.596 ; 37,38.468 cw(c37.582,37.886) C15.2@37.653,38.705 ; 37.059,38.526 cw(c37.53,38.055) C15.2@37.741,38.687 ; v1(39.523,40.22) 39.934,40.63 40.678,40.63 43.079,38.23 v1(43.079,36.41) 44.87,36.41 45.72,35.56 45.72,34.036 C19.2@45.692,34.008 C18.2@46.962,32.738 ; v1(39.919,34.516) C17.2@41.176,34.516 C16.2@42.446,35.786 ; C28.1@40.012,16.723 ccw(c39.324,16.485) v1(39.324,17.213) 39.683,17.213 C28.1@40.132,16.764 C29.1@41.402,15.494 41.91,14.986 v1(42.164,14.986) ; v1(40.132,52.197) 40.386,51.943 40.386,50.292 43.18,47.498 46.063,47.498 46.125,47.56 46.125,47.57 46.129,47.574 v1(46.228,47.574) ; v1@40.168,52.233 cw(c39.641,51.706) 40.386,51.706 ; v1(40.792,25.311) 42.329,25.311 44.704,27.686 44.704,28.194 44.354,28.544 v1(44.354,28.618) ; v1@40.827,25.347 cw(c40.395,24.89) 41.024,24.89 ; v1@40.828,25.346 cw(c40.354,24.872) 41.024,24.872 ; 41.817,15.079 ccw(c42.164,15.426) v1@42.164,14.935 ; C21.2@42.39,30.452 C20.2@43.66,29.182 ; 58.166,45.703 ccw(c58.911,45.703) v1@58.384,45.176 ; v1(58.166,48.006) 58.166,45.466 v1(58.42,45.212) ; 68.58,21.337 ccw(c69.173,21.337) R23.1@68.754,20.918 ; v1(68.58,21.717) 68.58,20.912 R23.1@68.664,20.828 68.664,20.465 v1(71.044,18.085) ; R23.1@68.791,20.828 ccw(c69.975,20.828) 69.138,19.991 ; v1@22.809,31.496 cw(c23.185,31.496) 22.919,31.762 ccw(c23.185,31.496) v1@22.809,31.496 ; v1@22.809,31.496 cw(c23.297,31.497) 22.952,31.842 ; 22.952,31.842 23,31.842 25.146,33.989 25.146,36.322 26.162,37.338 26.918,37.338 27.172,37.084 ; 27.172,37.084 27.172,37.84 28.956,39.624 v1(30.226,39.624) ; v1(30.226,39.624) 30.226,40.894 31.496,42.164 ; v1@39.324,17.264 cw(c39.324,16.519) 39.85,17.046 ccw(c39.324,16.519) v1@39.324,17.264
pads on no net: JTAG1.11 JTAG1.17 JTAG1.19 P2.42 U1.106 U2.9 U2.10 U2.11 U2.12 U2.15 USB_232.4 USB_232.6 USB_232.7 USB_232.8 USB_232.9 USB_232.MH1 USB_232.MH2 USB_HOST1.4 USB_HOST1.6 USB_HOST1.7 USB_HOST1.8 USB_HOST1.9 USB_HOST1.MH1 USB_HOST1.MH2 Y1.3

## Polygon pours and split planes (outlines as drawn)
GND on Top Layer "TopOverlay-No Net" (hatched 90Degree grid 0.508 track 0.254, remove dead copper, pour order 1000): -12.703,69.635 -12.627,69.559 85.519,69.559 85.519,-6.641 85.569,-6.692 85.493,-6.615 -12.652,-6.615
GND on Bottom Layer "TopOverlay-No Net" (hatched 90Degree grid 0.508 track 0.254, remove dead copper, pour order 1001): -11.766,69.496 -11.689,69.419 86.456,69.419 86.456,-6.781 86.507,-6.831 86.431,-6.755 -11.715,-6.755

## Keep-outs
Keep-Out Layer:
  the board outline again, w0.254

## Silkscreen, mask and mechanical layers (free items; w line width, h text height)
Top Overlay:
  circle w0.254: c78.66,0 r1.552
  circle w0.254: c-5,0 r1.552
  circle w0.254: c78.66,62.54 r1.552
  circle w0.254: c-5,62.54 r1.552
  rectangle: -1.4,58.73 6.35,63.81
Mechanical 1:
  the board outline again, w0.254

## Text inside footprints (layer, text, board x,y; h text height)
BOOT1: Top Overlay "6" at 3.132,30.988 h1.27; Top Overlay "5" at 3.132,28.448 h1.27; Top Overlay "2" at -6.012,30.988 h1.27; Top Overlay "1" at -5.504,28.448 h1.27
CAN_BUS1: Top Overlay "6" at 62.738,47.498 h1.27 r270; Top Overlay "5" at 60.198,47.498 h1.27 r270; Top Overlay "2" at 62.738,56.642 h1.27 r270; Top Overlay "1" at 60.198,56.134 h1.27 r270
P1: Bottom Overlay "60" at 72.746,-1.803 h1.27 r180; Bottom Overlay "59" at 72.847,5.791 h1.27 r180; Bottom Overlay "1" at -0.203,5.994 h1.27 r180; Bottom Overlay "2" at -0.33,-2.134 h1.27 r180
P2: Bottom Overlay "60" at 72.644,57.963 h1.27 r180; Bottom Overlay "59" at 72.619,65.964 h1.27 r180; Bottom Overlay "1" at -0.025,66.015 h1.27 r180; Bottom Overlay "2" at -0.406,57.963 h1.27 r180
U6: Top Overlay "1" at 61.146,24.967 h1.27